# Allegro board backup.brd
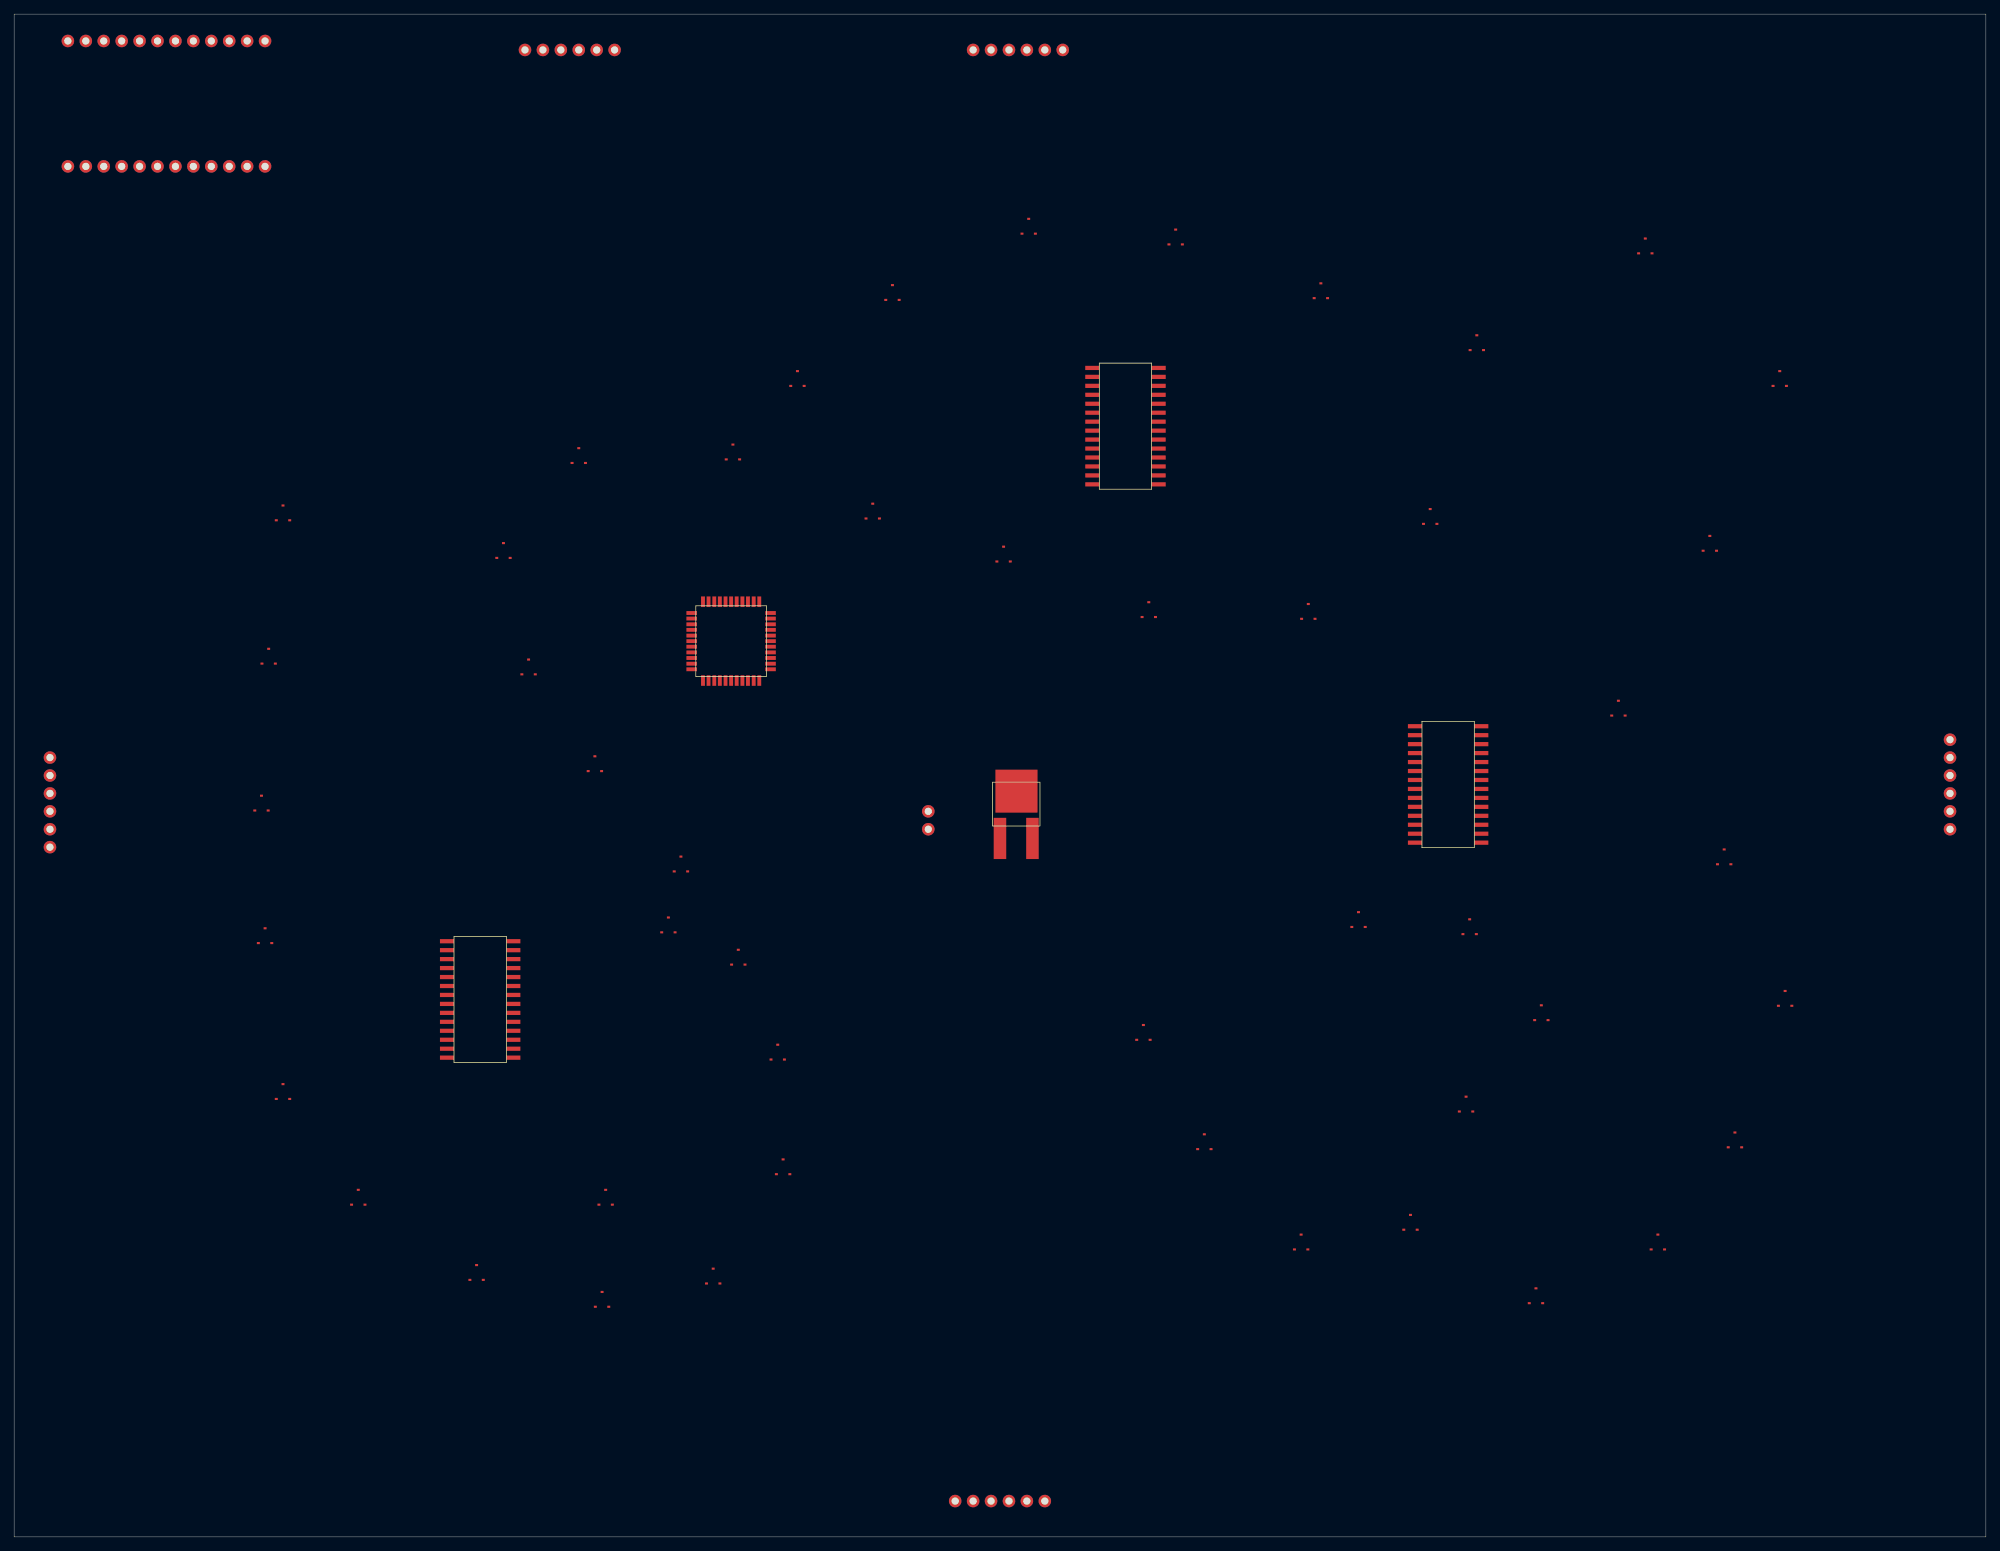
[diagram p0: board, top side]
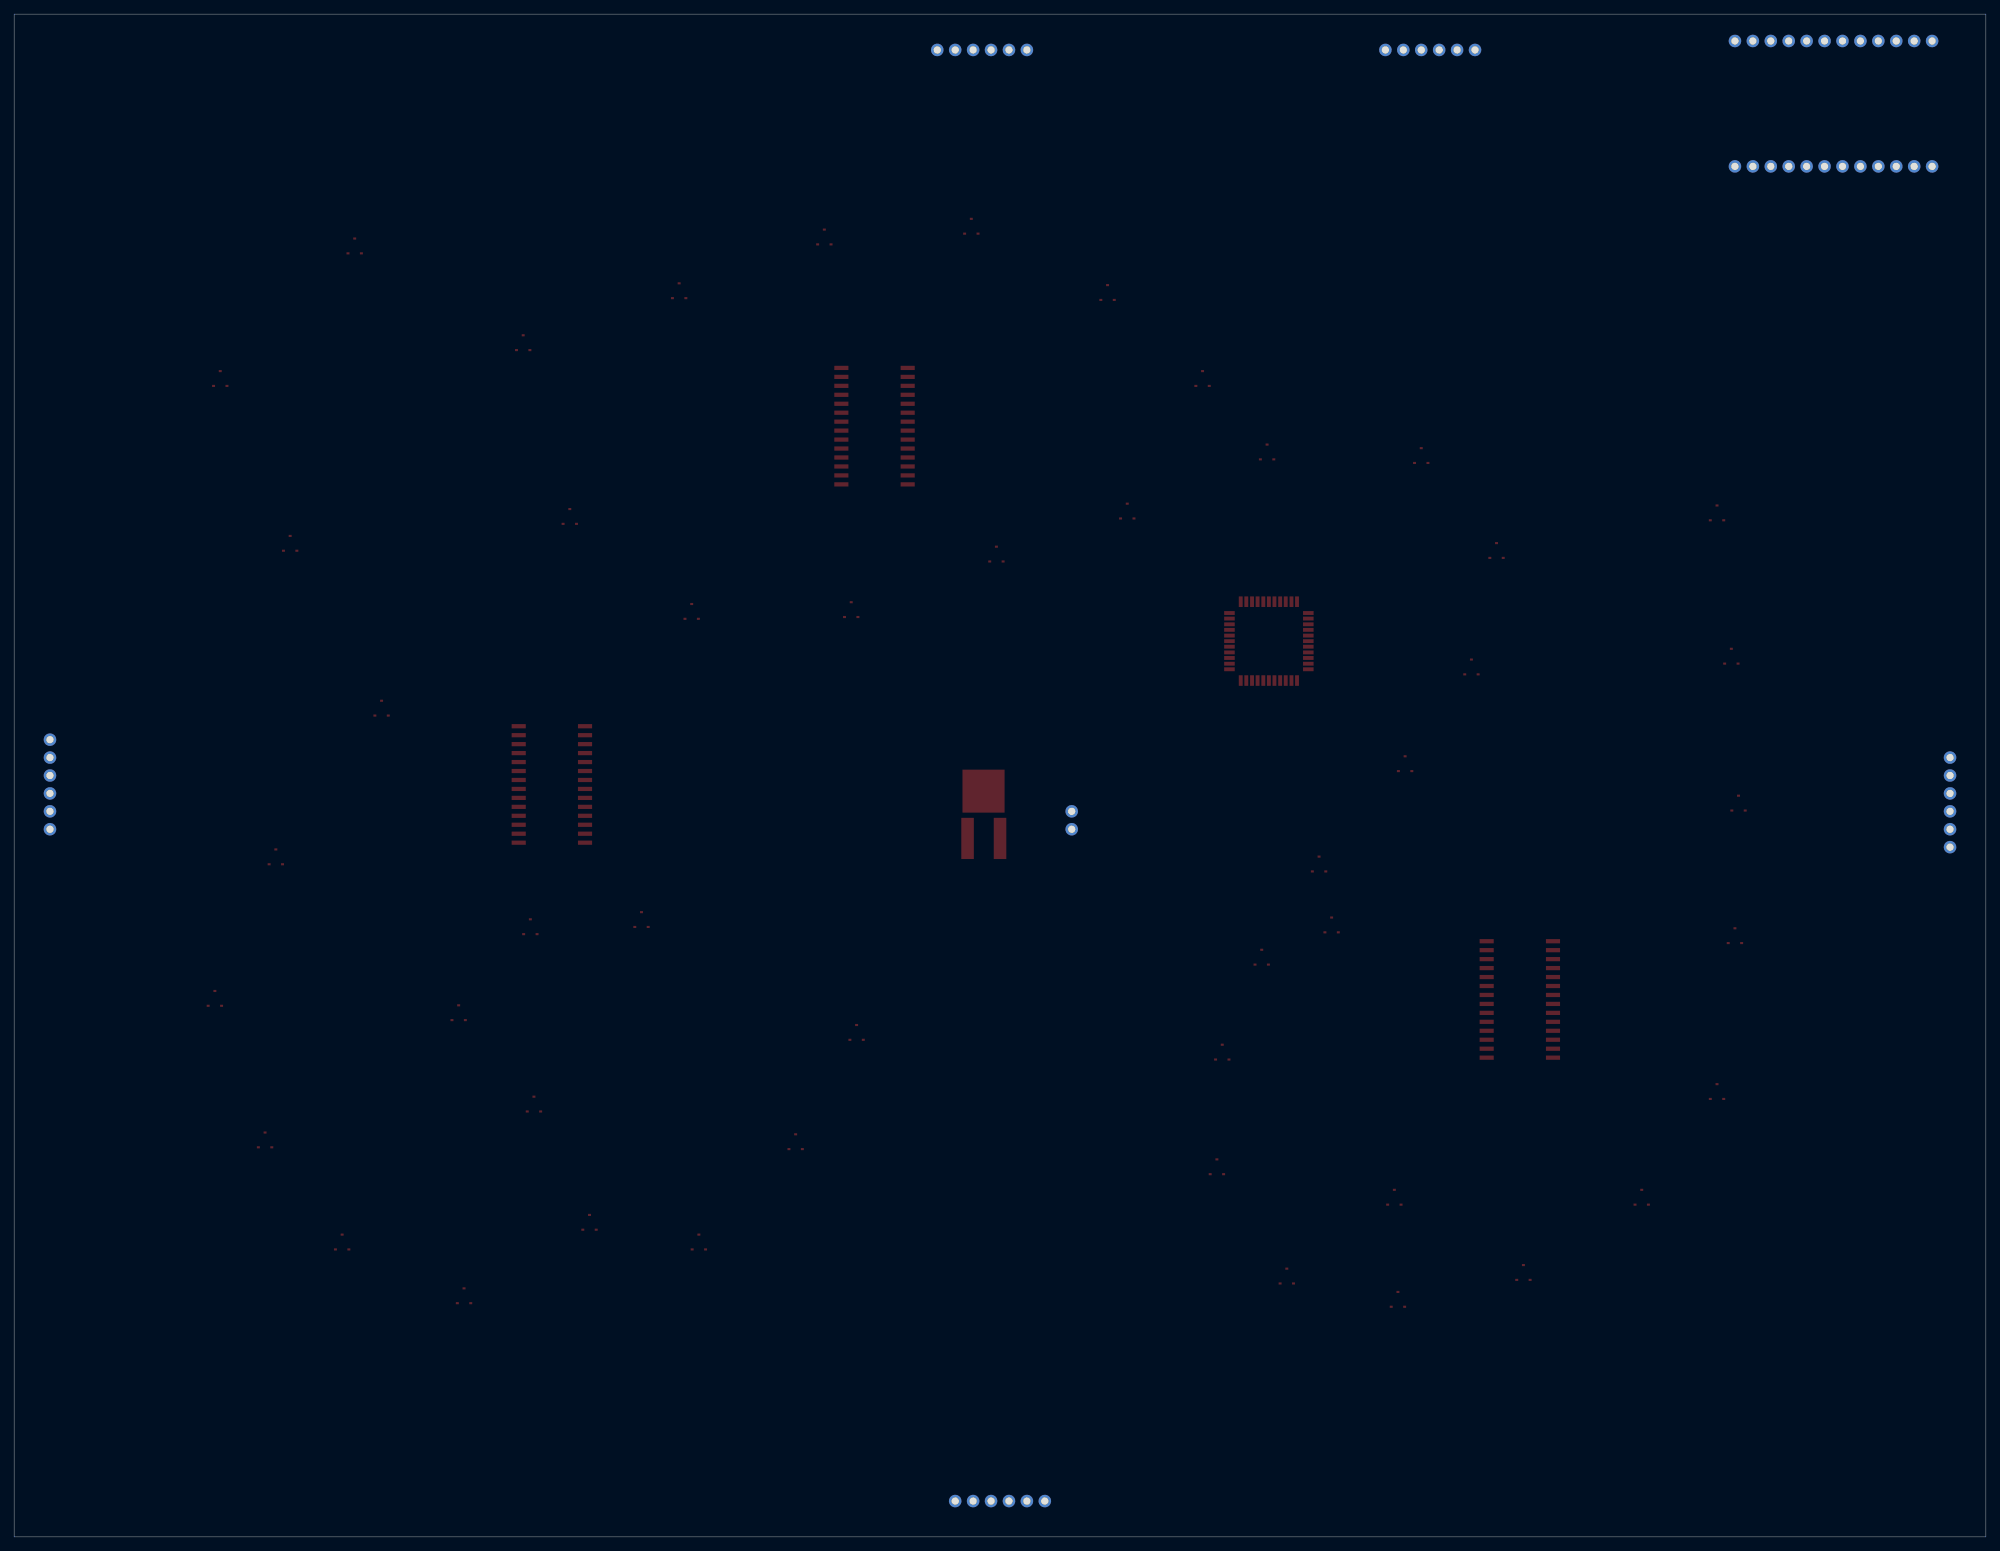
[diagram p1: board, bottom side, seen from below]

Outline 279.4 x 215.9 mm; copper layers: TOP, BOTTOM. Coordinates in mm from the lower left corner of the outline.
Outline path: 0,215.9 0,0 279.4,0 279.4,215.9 0,215.9

## Placement (name value [footprint] x y rotation side)
BT1  7.2V  [HEADER1X2]  129.54 101.6 180 top
J6  CON6  [HEADER1X6]  73.66 210.82 90 top
J9  Board Connector  [HEADER1X6]  5.08 109.22 0 top
J10  Board Connector  [HEADER1X6]  137.16 210.82 90 top
J11  Board Connector  [HEADER1X6]  274.32 101.6 180 top
J12  Board Connector  [HEADER1X6]  144.78 5.08 270 top
U1  -  [TCS40DPR]  38.1 145.03 0 top
U2  -  [TCS40DPR]  190.5 87.38 0 top
U3  -  [TCS40DPR]  250.19 164.08 0 top
U4  -  [TCS40DPR]  231.14 182.88 0 top
U5  -  [TCS40DPR]  72.9 123.19 0 top
U6  -  [TCS40DPR]  82.3 109.47 0 top
U7  -  [TCS40DPR]  206.25 86.36 0 top
U8  -  [TCS40DPR]  216.41 74.17 0 top
U9  -  [TCS40DPR]  207.26 169.16 0 top
U10  -  [TCS40DPR]  185.17 176.53 0 top
U11  -  [TCS40DPR]  94.49 95.25 0 top
U12  -  [TCS40DPR]  102.62 82.04 0 top
U13  PIC18F47K40-I/PT  [TQFPPIC18F47K40]  101.6 127 0 top
U14  -  [TCS40DPR]  205.74 61.21 0 top
U15  -  [TCS40DPR]  197.87 44.45 0 top
U16  -  [TCS40DPR]  164.59 184.15 0 top
U17  -  [TCS40DPR]  143.76 185.67 0 top
U18  -  [TCS40DPR]  108.2 68.58 0 top
U19  -  [TCS40DPR]  108.97 52.32 0 top
U20  -  [TCS40DPR]  160.02 71.37 0 top
U21  -  [TCS40DPR]  168.66 55.88 0 top
U22  -  [TCS40DPR]  124.46 176.28 0 top
U23  -  [TCS40DPR]  111 164.08 0 top
U24  -  [TCS40DPR]  99.06 36.83 0 top
U25  -  [TCS40DPR]  83.31 33.53 0 top
U26  -  [TCS40DPR]  182.37 41.66 0 top
U27  -  [TCS40DPR]  215.65 34.04 0 top
U28  -  [TCS40DPR]  200.66 144.53 0 top
U29  -  [TCS40DPR]  183.39 131.06 0 top
U30  -  [TCS40DPR]  92.71 86.61 0 top
U31  -  [TCS40DPR]  83.82 48.01 0 top
U32  -  [TCS40DPR]  232.92 41.66 0 top
U33  -  [TCS40DPR]  243.84 56.13 0 top
U34  -  [TCS40DPR]  160.78 131.32 0 top
U35  -  [TCS40DPR]  140.21 139.19 0 top
U36  -  [TCS40DPR]  65.53 37.34 0 top
U37  -  [TCS40DPR]  48.77 48.01 0 top
U38  -  [TCS40DPR]  250.95 76.2 0 top
U39  -  [TCS40DPR]  242.32 96.27 0 top
U40  -  [TCS40DPR]  121.67 145.29 0 top
U41  -  [TCS40DPR]  101.85 153.67 0 top
U42  -  [TCS40DPR]  38.1 62.99 0 top
U43  -  [TCS40DPR]  35.56 85.09 0 top
U45  -  [TCS40DPR]  227.33 117.35 0 top
U46  -  [TCS40DPR]  240.28 140.72 0 top
U47  -  [TCS40DPR]  80.01 153.16 0 top
U48  -  [TCS40DPR]  69.34 139.7 0 top
U49  -  [TCS40DPR]  35.05 103.89 0 top
U50  -  [TCS40DPR]  36.07 124.71 0 top
U51  MCP23017T  [MCP23017]  203.2 106.68 0 top
U52  MCP23017T  [MCP23017]  157.48 157.48 0 top
U53  MCP23017T  [MCP23017]  66.04 76.2 0 top
U54  MIC29310-5.0WU  [TO252AA]  139.7 99.06 0 top
U57  Photon  [PHOTONFOOTPRINT]  15.24 203.2 90 top

## Library data of the parts
BT1 = BATTERY
J6 = CON6
J9-J12 = Board Connector
U1-U12 U14-U43 U45-U50 = TCS40DPR
U13 = PIC18F47K40-I/PT_0
U51-U53 = MCP23017T
U54 = MIC29310-5.0WU
U57 = Photon

## Footprints (pads in the part's own frame, mm; a bottom-side part is the same pattern mirrored in y, then rotated)
HEADER1X2
  round 1.778 hole 1.016: 1(0,1.27) 2(0,-1.27)
HEADER1X6
  round 1.778 hole 1.016: 1(0,1.27) 2(0,-1.27) 3(0,-3.81) 4(0,-6.35) 5(0,-8.89) 6(0,-11.43)
MCP23017
  rect 2x0.6 smd: 1(-4.699,8.255) 2(-4.699,6.985) 3(-4.699,5.715) 4(-4.699,4.445) 5(-4.699,3.175) 6(-4.699,1.905) 7(-4.699,0.635) 8(-4.699,-0.635) 9(-4.699,-1.905) 10(-4.699,-3.175) 11(-4.699,-4.445) 12(-4.699,-5.715) 13(-4.699,-6.985) 14(-4.699,-8.255) 15(4.699,-8.255) 16(4.699,-6.985) 17(4.699,-5.715) 18(4.699,-4.445) 19(4.699,-3.175) 20(4.699,-1.905) 21(4.699,-0.635) 22(4.699,0.635) 23(4.699,1.905) 24(4.699,3.175) 25(4.699,4.445) 26(4.699,5.715) 27(4.699,6.985) 28(4.699,8.255)
PHOTONFOOTPRINT
  round 1.778 hole 1.016: 1(8.89,7.62) 2(8.89,5.08) 3(8.89,2.54) 4(8.89,0) 5(8.89,-2.54) 6(8.89,-5.08) 7(8.89,-7.62) 8(8.89,-10.16) 9(8.89,-12.7) 10(8.89,-15.24) 11(8.89,-17.78) 12(8.89,-20.32) 13(-8.89,7.62) 14(-8.89,5.08) 15(-8.89,2.54) 16(-8.89,0) 17(-8.89,-2.54) 18(-8.89,-5.08) 19(-8.89,-7.62) 20(-8.89,-10.16) 21(-8.89,-12.7) 22(-8.89,-15.24) 23(-8.89,-17.78) 24(-8.89,-20.32)
TCS40DPR
  rect 0.42x0.3 smd: 1(-0.95,-0.9) 2(0.95,-0.9) 3(0,1.2)
TO252AA
  rect 1.778x5.842 smd: 1(-0.004,-0.034) 3(4.596,-0.034)
  rect 5.969x6.096 smd: 2(2.332,6.673)
TQFPPIC18F47K40
  rect 1.5x0.55 smd: 1(-5.588,3.988) 2(-5.588,3.2) 3(-5.588,2.388) 4(-5.588,1.6) 5(-5.588,0.787) 6(-5.588,0) 7(-5.588,-0.787) 8(-5.588,-1.6) 9(-5.588,-2.388) 10(-5.588,-3.2) 11(-5.588,-3.988) 23(5.588,-3.988) 24(5.588,-3.2) 25(5.588,-2.388) 26(5.588,-1.6) 27(5.588,-0.787) 28(5.588,0) 29(5.588,0.787) 30(5.588,1.6) 31(5.588,2.388) 32(5.588,3.2) 33(5.588,3.988)
  rect 0.55x1.5 smd: 12(-3.988,-5.588) 13(-3.2,-5.588) 14(-2.388,-5.588) 15(-1.6,-5.588) 16(-0.787,-5.588) 17(0,-5.588) 18(0.787,-5.588) 19(1.6,-5.588) 20(2.388,-5.588) 21(3.2,-5.588) 22(3.988,-5.588) 34(3.988,5.588) 35(3.2,5.588) 36(2.388,5.588) 37(1.6,5.588) 38(0.787,5.588) 39(0,5.588) 40(-0.787,5.588) 41(-1.6,5.588) 42(-2.388,5.588) 43(-3.2,5.588) 44(-3.988,5.588)

## Nets
GND: BT1.2(-) J6.3 J9.6(GND) J10.6(GND) J11.6(GND) J12.6(GND) U1.3(GND) U2.3(GND) U3.3(GND) U4.3(GND) U5.3(GND) U6.3(GND) U7.3(GND) U8.3(GND) U9.3(GND) U10.3(GND) U11.3(GND) U12.3(GND) U13.6(VSS_0) U13.30(VSS_1) U14.3(GND) U15.3(GND) U16.3(GND) U17.3(GND) U18.3(GND) U19.3(GND) U20.3(GND) U21.3(GND) U22.3(GND) U23.3(GND) U24.3(GND) U25.3(GND) U26.3(GND) U27.3(GND) U28.3(GND) U29.3(GND) U30.3(GND) U31.3(GND) U32.3(GND) U33.3(GND) U34.3(GND) U35.3(GND) U36.3(GND) U37.3(GND) U38.3(GND) U39.3(GND) U40.3(GND) U41.3(GND) U42.3(GND) U43.3(GND) U45.3(GND) U46.3(GND) U47.3(GND) U48.3(GND) U49.3(GND) U50.3(GND) U51.10(VSS) U51.18(RESET) U51.19(INTB) U51.20(INTA) U52.10(VSS) U52.18(RESET) U52.19(INTB) U52.20(INTA) U53.10(VSS) U53.18(RESET) U53.19(INTB) U53.20(INTA) U54.2(GND) U57.11 U57.21
5 V: J6.2 U1.1(VCC) U2.1(VCC) U3.1(VCC) U4.1(VCC) U5.1(VCC) U6.1(VCC) U7.1(VCC) U8.1(VCC) U9.1(VCC) U10.1(VCC) U11.1(VCC) U12.1(VCC) U13.7(VDD_0) U13.28(VDD_1) U14.1(VCC) U15.1(VCC) U16.1(VCC) U17.1(VCC) U18.1(VCC) U19.1(VCC) U20.1(VCC) U21.1(VCC) U22.1(VCC) U23.1(VCC) U24.1(VCC) U25.1(VCC) U26.1(VCC) U27.1(VCC) U28.1(VCC) U29.1(VCC) U30.1(VCC) U31.1(VCC) U32.1(VCC) U33.1(VCC) U34.1(VCC) U35.1(VCC) U36.1(VCC) U37.1(VCC) U38.1(VCC) U39.1(VCC) U40.1(VCC) U41.1(VCC) U42.1(VCC) U43.1(VCC) U45.1(VCC) U46.1(VCC) U47.1(VCC) U48.1(VCC) U49.1(VCC) U50.1(VCC) U51.9(VDD) U52.9(VDD) U53.9(VDD) U54.3(OUT) U57.12
CD1: J9.5(CD) U13.39(RD0)
CD2: J10.5(CD) U13.38(RD1)
CD3: J11.5(CD) U13.33(RA6)
CD4: J12.5(CD) U13.32(RA7)
ICSPCLK: U13.16(ICSPCLK/RB6)
ICSPDAT: U13.17(ICSPDAT/RB7)
MCLR/VPP: J6.1 U13.18(VPP/MCLR/RE3)
SCK: U13.37(RC3) U51.12(SCK) U52.12(SCK) U53.12(SCK) U57.14
SCK1: J9.1(SCK) J10.1(SCK) J11.1(SCK) J12.1(SCK)
SDA: U13.42(RC4) U51.13(SDA) U52.13(SDA) U53.13(SDA) U57.13
SDI1: J9.2(SDI) J10.2(SDI) J11.2(SDI) J12.2(SDI)
SDO1: J9.3(SDO) J10.3(SDO) J11.3(SDO) J12.3(SDO)
SS1: J9.4(SS) U13.44(RC6)
SS2: J10.4(SS) U13.43(RC5)
SS3: J11.4(SS) U13.41(RD3)
SS4: J12.4(SS) U13.40(RD2)
N40578: U6.2(VOUT) U53.21(GPA0)
N40604: U12.2(VOUT) U53.22(GPA1)
N40612: U19.2(VOUT) U53.23(GPA2)
N40620: U25.2(VOUT) U53.24(GPA3)
N40628: U31.2(VOUT) U53.25(GPA4)
N40636: U37.2(VOUT) U53.26(GPA5)
N40644: U43.2(VOUT) U53.27(GPA6)
N40652: U50.2(VOUT) U53.28(GPA7)
N41000: U53.16(A1)
N41020: U53.15(A0)
N41032: U53.17(A2)
N41290: U1.2(VOUT) U51.8(GPB7)
N41302: U7.2(VOUT) U51.7(GPB6)
N41314: U14.2(VOUT) U51.6(GPB5)
N41326: U20.2(VOUT) U51.5(GPB4)
N41338: U26.2(VOUT) U51.4(GPB3)
N41350: U32.2(VOUT) U51.3(GPB2)
N41362: U38.2(VOUT) U51.2(GPB1)
N41374: U45.2(VOUT) U51.1(GPB0)
N41442: U2.2(VOUT) U51.21(GPA0)
N41446: U8.2(VOUT) U51.22(GPA1)
N41450: U15.2(VOUT) U51.23(GPA2)
N41454: U21.2(VOUT) U51.24(GPA3)
N41458: U27.2(VOUT) U51.25(GPA4)
N41462: U33.2(VOUT) U51.26(GPA5)
N41466: U39.2(VOUT) U51.27(GPA6)
N41734: U46.2(VOUT) U51.28(GPA7)
N42242: U51.16(A1)
N42246: U51.15(A0)
N42268: U51.17(A2)
N42276: U52.15(A0)
N42308: U52.16(A1)
N42712: U3.2(VOUT) U52.8(GPB7)
N42740: U9.2(VOUT) U52.7(GPB6)
N42752: U16.2(VOUT) U52.6(GPB5)
N42772: U22.2(VOUT) U52.5(GPB4)
N42784: U28.2(VOUT) U52.4(GPB3)
N42796: U34.2(VOUT) U52.3(GPB2)
N42808: U40.2(VOUT) U52.2(GPB1)
N42820: U47.2(VOUT) U52.1(GPB0)
N42884: U4.2(VOUT) U52.21(GPA0)
N42896: U10.2(VOUT) U52.22(GPA1)
N42900: U17.2(VOUT) U52.23(GPA2)
N42904: U23.2(VOUT) U52.24(GPA3)
N42908: U29.2(VOUT) U52.25(GPA4)
N42912: U35.2(VOUT) U52.26(GPA5)
N42916: U41.2(VOUT) U52.27(GPA6)
N43192: U48.2(VOUT) U52.28(GPA7)
N43624: U52.17(A2)
N43852: U5.2(VOUT) U53.8(GPB7)
N43864: U11.2(VOUT) U53.7(GPB6)
N43876: U18.2(VOUT) U53.6(GPB5)
N43888: U24.2(VOUT) U53.5(GPB4)
N43900: U30.2(VOUT) U53.4(GPB3)
N43912: U36.2(VOUT) U53.3(GPB2)
N43924: U42.2(VOUT) U53.2(GPB1)
N43936: U49.2(VOUT) U53.1(GPB0)
N104053: BT1.1(+) U54.1(IN)
N111887: J6.4
N111889: J6.5
N118143: U13.27(RE2)
N118150: U13.26(RE1)
N118163: U13.25(RE0)
N118167: U13.22(RA3)
N118185: U13.19(RA0)
N118192: U13.2(RD4)
N118196: U13.3(RD5)
N118203: U13.4(RD6)
N118215: U13.5(RD7)
N118227: U13.9(RB0)
N118234: U13.10(RB1)
N118238: U13.11(RB2)
N118679: U13.36(RC2)
N118686: U13.35(RC1)
N118690: U13.34(RC0)
N128561: U13.21(RA2)
N128579: U13.20(RA1)

Pads without a net: J6 6; U13 1 8 12 13 14 15 23 24 29 31; U51 11 14; U52 11 14; U53 11 14; U57 1 2 3 4 5 6 7 8 9 10 15 16 17 18 19 20 22 23 24
